# Altium PCB PCB_UROP Project_2_2024-05-20.pcbdoc
Units mil, origin at the board's own origin, x right, y up, seen from the top; angles counter-clockwise.
Board outline 9611.18 x 6875.59 mil, 2 copper layers (Top Layer, Bottom Layer); 32 components, 280 nets, 340 pads, 22 vias.
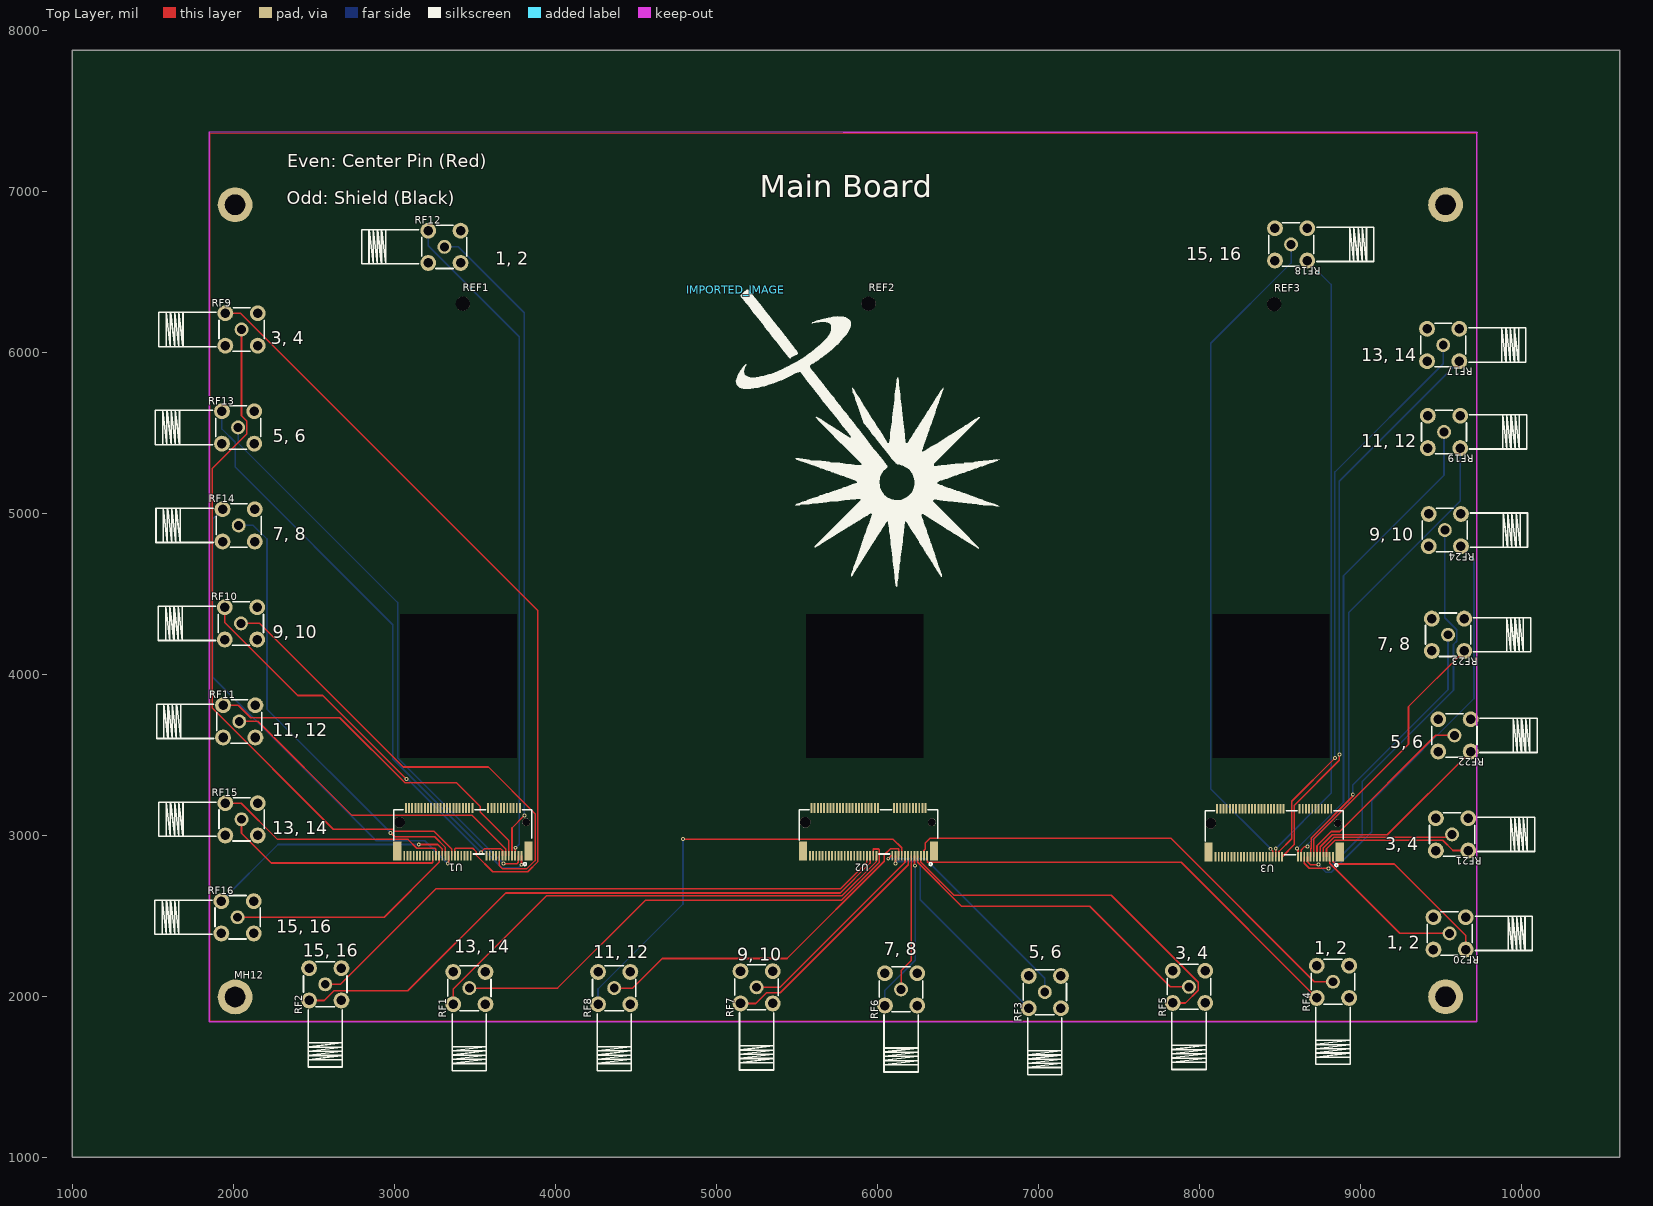
[diagram p0: Top Layer view]
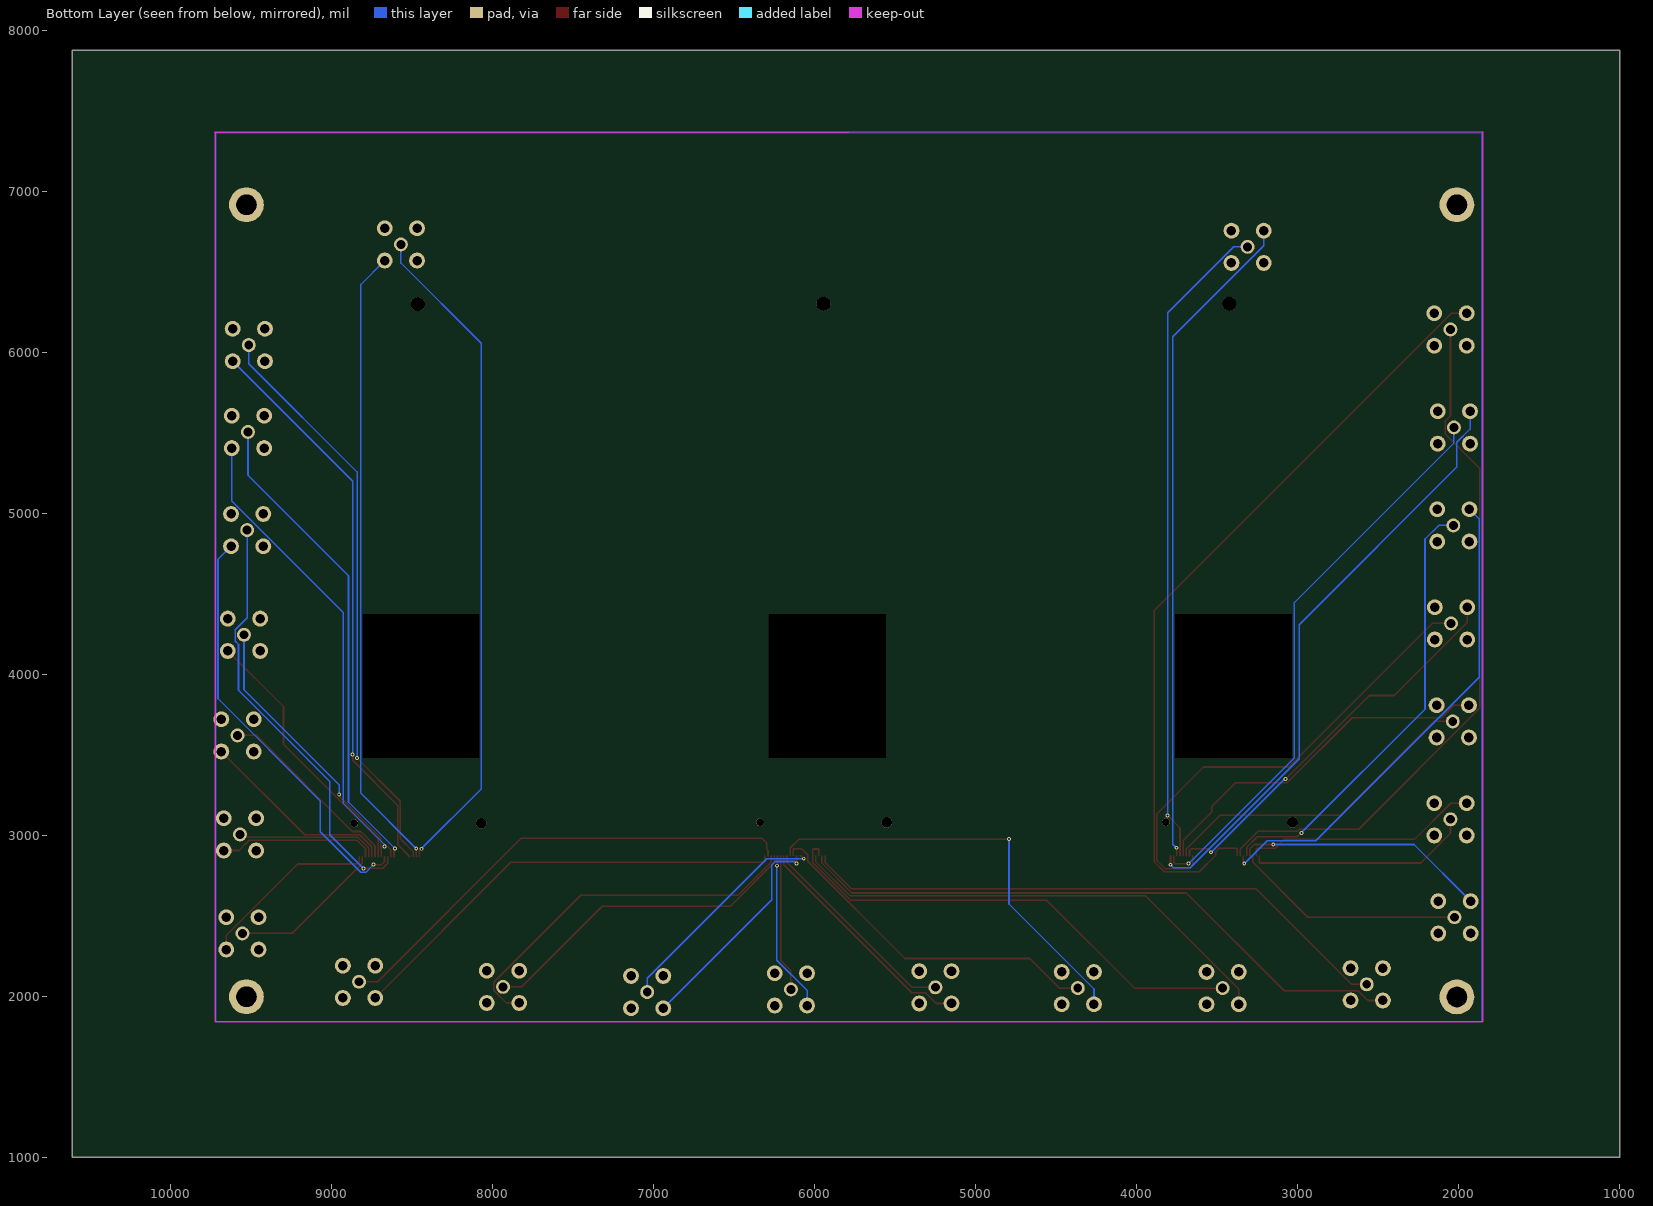
[diagram p1: Bottom Layer view, seen from below]

## Layer stack, top to bottom
Top Layer: signal copper (thickness not stored)
Dielectric: dielectric 12.6, FR-4, Dk 4.8
Bottom Layer: signal copper (thickness not stored)

## Board outline
10611.18,1000 1000,1000 1000,7875.59 10611.18,7875.59
cut-out: 3035.59,4373.09 3035.59,3483.09 3760.59,3483.09 3760.59,4373.09
cut-out: 5559.34,4373.09 5559.34,3483.09 6284.34,3483.09 6284.34,4373.09
cut-out: 8083.09,4373.09 8083.09,3483.09 8808.09,3483.09 8808.09,4373.09

## Components (designator, comment, footprint, x,y, rotation, side; value= is the part's Value field where it differs from the comment)
IMPORTED_IMAGE "IMPORTED_IMAGE" IMPORTED_IMAGE 5121.98,6388.23 r0 top
MH12 "MOUNTINGHOLE_3.2MM_M3_ISO14580_PAD" MOUNTINGHOLE_3.2MM_M3_ISO14580_PAD 2595.6,2040.58 r0 top
REF1 "MOUNTINGHOLE_2.2MM_M2_ISO14580" MOUNTINGHOLE_2.2MM_M2_ISO14580 3425.39,6302.31 r0 top
REF2 "MOUNTINGHOLE_2.2MM_M2_ISO14580" MOUNTINGHOLE_2.2MM_M2_ISO14580 5945.5,6302.31 r0 top
REF3 "MOUNTINGHOLE_2.2MM_M2_ISO14580" MOUNTINGHOLE_2.2MM_M2_ISO14580 8465.58,6298.77 r0 top
RF1 "HJ-SMA003" SMA-TH_HJ-SMA003 3465.59,2050.59 r90 top
RF2 "HJ-SMA003" SMA-TH_HJ-SMA003 2570.59,2074.16 r90 top
RF3 "HJ-SMA003" SMA-TH_HJ-SMA003 7040.59,2025.59 r90 top
RF4 "HJ-SMA003" SMA-TH_HJ-SMA003 8830.59,2089.88 r90 top
RF5 "HJ-SMA003" SMA-TH_HJ-SMA003 7936.3,2058.44 r90 top
RF6 "HJ-SMA003" SMA-TH_HJ-SMA003 6147.74,2042.73 r90 top
RF7 "HJ-SMA003" SMA-TH_HJ-SMA003 5250.59,2055.59 r90 top
RF8 "HJ-SMA003" SMA-TH_HJ-SMA003 4365.59,2050.59 r90 top
RF9 "HJ-SMA003" SMA-TH_HJ-SMA003 2050.59,6142.02 r0 top
RF10 "HJ-SMA003" SMA-TH_HJ-SMA003 2047.02,4316.3 r0 top
RF11 "HJ-SMA003" SMA-TH_HJ-SMA003 2036.3,3707.73 r0 top
RF12 "HJ-SMA003" SMA-TH_HJ-SMA003 3310.59,6655.59 r0 top
RF13 "HJ-SMA003" SMA-TH_HJ-SMA003 2029.16,5533.44 r0 top
RF14 "HJ-SMA003" SMA-TH_HJ-SMA003 2032.73,4924.87 r0 top
RF15 "HJ-SMA003" SMA-TH_HJ-SMA003 2050.59,3099.16 r0 top
RF16 "HJ-SMA003" SMA-TH_HJ-SMA003 2025.59,2490.59 r0 top
RF17 "HJ-SMA003" SMA-TH_HJ-SMA003 9515.59,6045.59 r180 top
RF18 "HJ-SMA003" SMA-TH_HJ-SMA003 8570.59,6670.59 r180 top
RF19 "HJ-SMA003" SMA-TH_HJ-SMA003 9520.59,5505.59 r180 top
RF20 "HJ-SMA003" SMA-TH_HJ-SMA003 9555.59,2390.59 r180 top
RF21 "HJ-SMA003" SMA-TH_HJ-SMA003 9570.59,3005.59 r180 top
RF22 "HJ-SMA003" SMA-TH_HJ-SMA003 9585.59,3620.59 r180 top
RF23 "HJ-SMA003" SMA-TH_HJ-SMA003 9545.59,4245.59 r180 top
RF24 "HJ-SMA003" SMA-TH_HJ-SMA003 9525.59,4895.59 r180 top
U1 "M.2_E-KEY" CONN-SMD_M.2_E-KEY 3425.39,3021.69 r180 top
U2 "M.2_E-KEY" CONN-SMD_M.2_E-KEY 5945.49,3021.69 r180 top
U3 "M.2_E-KEY" CONN-SMD_M.2_E-KEY 8465.59,3015.59 r180 top

## Footprints (in the part's own frame and the unit in brackets; to place one, negate y for a bottom-side part, rotate by r counter-clockwise, add the part's x,y. Pads: shape width x height; smd on the part's side, far side on the other; paste and mask are expansions set on the pad)
CONN-SMD_M.2_E-KEY [mm]
  rect 0.3x1.55 smd paste+0 mask+0.05: 1(-9.25,3.775) 2(-9,-3.775) 3(-8.75,3.775) 4(-8.5,-3.775) 5(-8.25,3.775) 6(-8,-3.775) 7(-7.75,3.775) 8(-7.5,-3.775) 9(-7.25,3.775) 10(-7,-3.775) 11(-6.75,3.775) 12(-6.5,-3.775) 13(-6.25,3.775) 14(-6,-3.775) 15(-5.75,3.775) 16(-5.5,-3.775) 17(-5.25,3.775) 18(-5,-3.775) 19(-4.75,3.775) 20(-4.5,-3.775) 21(-4.25,3.775) 22(-4,-3.775) 23(-3.75,3.775) 32(-1.5,-3.775) 33(-1.25,3.775) 34(-1,-3.775) 35(-0.75,3.775) 36(-0.5,-3.775) 37(-0.25,3.775) 38(0,-3.775) 39(0.25,3.775) 40(0.5,-3.775) 41(0.75,3.775) 42(1,-3.775) 43(1.25,3.775) 44(1.5,-3.775) 45(1.75,3.775) 46(2,-3.775) 47(2.25,3.775) 48(2.5,-3.775) 49(2.75,3.775) 50(3,-3.775) 51(3.25,3.775) 52(3.5,-3.775) 53(3.75,3.775) 54(4,-3.775) 55(4.25,3.775) 56(4.5,-3.775) 57(4.75,3.775) 58(5,-3.775) 59(5.25,3.775) 60(5.5,-3.775) 61(5.75,3.775) 62(6,-3.775) 63(6.25,3.775) 64(6.5,-3.775) 65(6.75,3.775) 66(7,-3.775) 67(7.25,3.775) 68(7.5,-3.775) 69(7.75,3.775) 70(8,-3.775) 71(8.25,3.775) 72(8.5,-3.775) 73(8.75,3.775) 74(9,-3.775) 75(9.25,3.775)
  rect 1.3x3 smd paste+0 mask+0.05: 76(-10.35,3) 77(10.35,3)
  round 1.2 hole 1.2 unplated paste+0: ""(-10,-1.5)
  round 1.7 hole 1.7 unplated paste+0: ""(10,-1.5)
  silkscreen extent -10.9,-3.5 10.9,5.32
IMPORTED_IMAGE [mil]
  silkscreen extent 0,-1845 1637,0
MOUNTINGHOLE_2.2MM_M2_ISO14580 [mm]
  round 2.2 hole 2.2 slot 2.205 at 0 deg unplated paste+0 mask+0.102: 1(0,0)
MOUNTINGHOLE_3.2MM_M3_ISO14580_PAD [mil]
  round 216.53 hole 125.98 slot 126.18 at 0 deg paste+0 mask+2: 1(-585.01,-44.99)
SMA-TH_HJ-SMA003 [mm]
  round 2.2 hole 1.4 paste+0 mask+0.051: 1(0,0)
  round 2.5 hole 1.5 paste+0 mask+0.051: 2(-2.55,2.55) 3(-2.55,-2.55) 4(2.55,-2.55) 5(2.55,2.55)
  silkscreen extent -13.04,-3.43 3.56,3.43

## Free pads (board coordinates)
  round 216.53 hole 125.98 slot 126.18 at 0 deg paste+0 mask+2: 1(2010.59,6916.84) 1(9530.26,1996.89) 1(9530.26,6916.84)

## Via types
v1: diameter 24.02, hole 12.01, Top Layer to Bottom Layer, tented both sides, 22 vias

## Nets (pads, with @x,y where several pads share a name; then routed paths per layer and width w, separated by ;. In a path a pad name is that pad's centre, name@x,y a point inside that pad or via, vN(x,y) a via of type N, cw(c..) or ccw(c..) an arc to the next point about the centre after c; other vN are vias at no path point)
GND: 
RF1_3: RF1.3
RF1_4: RF1.4
RF1_5: RF1.5
RF2_3: RF2.3
RF2_4: RF2.4
RF2_5: RF2.5
RF3_3: RF3.3
RF3_4: RF3.4
RF3_5: RF3.5
RF4_3: RF4.3
RF4_4: RF4.4
RF4_5: RF4.5
RF5_3: RF5.3
RF5_4: RF5.4
RF5_5: RF5.5
RF6_3: RF6.3
RF6_4: RF6.4
RF6_5: RF6.5
RF7_3: RF7.3
RF7_4: RF7.4
RF7_5: RF7.5
RF8_3: RF8.3
RF8_4: RF8.4
RF8_5: RF8.5
RF9_1: RF9.1 U1.45 | length 4347.2
  Top Layer w10: RF9.1 2050.59,5606.53 2083.53,5573.59 2083.53,5493.33 1868.2,5278 1868.2,3790.06 2619.99,3038.27 2986.45,3038.27 3000.8,3023.92 3247.14,3023.92 3356.49,2914.57 U1.45
RF9_2: RF9.2 U1.43 | length 4924.2
  Top Layer w10: RF9.2 2044.7,6242.41 3891.58,4395.53 3891.58,2836.39 3828.34,2773.15 3611.52,2773.15 3507.63,2877.04 3507.63,2898.62 3486.47,2919.78 3381.39,2919.78 3376.18,2914.57 U1.43
RF9_3: RF9.3
RF9_4: RF9.4
RF9_5: RF9.5
RF10_1: RF10.1 U1.15 | length 2920.9
  Top Layer w10: RF10.1 2162.57,4316.3 3054.84,3424.03 3584.35,3424.03 3873.97,3134.41 3873.97,2843.46 3821.39,2790.88 3673.42,2790.88 3651.77,2812.53 U1.15
RF10_2: RF10.2 U1.13 | length 2457.4
  Top Layer w10: RF10.2 1946.63,4322.21 2400.45,3868.39 2555.19,3868.39 v1(3074.98,3348.6) ; v1(3537.13,2894.45) 3559.91,2917.23 3659.66,2917.23 3671.45,2905.44 U1.13
  Bottom Layer w10: v1(3074.98,3348.6) 3082.98,3348.6 v1(3537.13,2894.45)
RF10_3: RF10.3
RF10_4: RF10.4
RF10_5: RF10.5
RF11_1: RF11.1 U1.11 | length 2024.9
  Top Layer w10: RF11.1 2151.85,3707.73 2734.3,3125.28 3480.43,3125.28 3691.14,2914.57 U1.11
RF11_2: RF11.2 U1.9 | length 2237.3
  Top Layer w10: RF11.2 2030.41,3808.12 2108.37,3730.16 2660.81,3730.16 3065.43,3325.54 3386.44,3325.54 3533.66,3178.32 3533.66,3144.76 3710.82,2967.6 U1.9
RF11_3: RF11.3
RF11_4: RF11.4
RF11_5: RF11.5
RF12_1: RF12.1 U1.7 | length 4071
  Top Layer w10: U1.7 3730.51,3045.51 v1(3807.47,3122.47)
  Bottom Layer w10: RF12.1 3397.25,6655.59 3807.47,6245.37 v1(3807.47,3122.47)
RF12_2: RF12.2 U1.5 | length 4127.2
  Top Layer w10: U1.5 3750.19,2919.26 v1(3753.58,2922.65)
  Bottom Layer w10: RF12.2 3210.2,6661.5 3775.11,6096.59 3775.11,2944.18 v1(3753.58,2922.65)
RF12_3: RF12.3
RF12_4: RF12.4
RF12_5: RF12.5
RF13_1: RF13.1 U1.3 | length 3529.4
  Top Layer w10: v1(3678.29,2823.56) 3761.87,2823.56 3769.88,2831.57 U1.3
  Bottom Layer w10: RF13.1 2029.16,5436.75 3020.05,4445.86 3020.05,3481.8 v1(3678.29,2823.56)
RF13_2: RF13.2 U1.1 | length 3741.2
  Top Layer w10: v1(3789.56,2817.05) U1.1
  Bottom Layer w10: RF13.2 1928.77,5524.13 2011.47,5441.43 2011.47,5287.44 2990.4,4308.51 2990.4,3475.1 3666.49,2799.01 3771.52,2799.01 v1(3789.56,2817.05)
RF13_3: RF13.3
RF13_4: RF13.4
RF13_5: RF13.5
RF14_1: RF14.1 U1.49 | length 2783.5
  Top Layer w10: v1(2976.89,3015.21) 3001.88,2990.22 3251.32,2990.22 3317.12,2924.42 U1.49
  Bottom Layer w10: RF14.1 2124.19,4924.87 2208.44,4840.62 2208.44,3783.66 v1(2976.89,3015.21)
RF14_2: RF14.2 U1.47 | length 3060.5
  Top Layer w10: v1(3331.77,2823.59) 3336.81,2828.63 U1.47
  Bottom Layer w10: RF14.2 1871.36,4964.28 1871.36,3981.7 2886.96,2966.1 3189.26,2966.1 v1(3331.77,2823.59)
RF14_3: RF14.3
RF14_4: RF14.4
RF14_5: RF14.5
RF15_1: RF15.1 U1.57 | length 1394.1
  Top Layer w10: RF15.1 2050.59,3012.5 2235.44,2827.65 3234.46,2827.65 3238.38,2831.57 U1.57
RF15_2: RF15.2 U1.55 | length 1467.4
  Top Layer w10: RF15.2@1950.2,3199.55 2047.92,3199.55 2273.31,2974.16 3085.06,2974.16 3139.38,2919.84 3252.8,2919.84 3258.07,2914.57 U1.55
RF15_3: RF15.3
RF15_4: RF15.4
RF15_5: RF15.5
RF16_1: RF16.1 U1.53 | length 1434.9
  Top Layer w10: RF16.1 2936.77,2490.59 3277.75,2831.57 U1.53
RF16_2: RF16.2 U1.51 | length 1571.2
  Top Layer w10: v1(3151.51,2942.9) 3269.11,2942.9 3297.44,2914.57 U1.51
  Bottom Layer w10: RF16.2 2277.12,2942.9 v1(3151.51,2942.9)
RF16_3: RF16.3
RF16_4: RF16.4
RF16_5: RF16.5
RF17_3: RF17.3
RF17_4: RF17.4
RF17_5: RF17.5
RF18_3: RF18.3
RF18_4: RF18.4
RF18_5: RF18.5
RF19_3: RF19.3
RF19_4: RF19.4
RF19_5: RF19.5
RF20_3: RF20.3
RF20_4: RF20.4
RF20_5: RF20.5
RF21_3: RF21.3
RF21_4: RF21.4
RF21_5: RF21.5
RF22_3: RF22.3
RF22_4: RF22.4
RF22_5: RF22.5
RF23_3: RF23.3
RF23_4: RF23.4
RF23_5: RF23.5
RF24_3: RF24.3
RF24_4: RF24.4
RF24_5: RF24.5
U1_2: U1.2
U1_4: U1.4
U1_6: U1.6
U1_8: U1.8
U1_10: U1.10
U1_12: U1.12
U1_14: U1.14
U1_16: U1.16
U1_17: U1.17
U1_18: U1.18
U1_19: U1.19
U1_20: U1.20
U1_21: U1.21
U1_22: U1.22
U1_23: U1.23
U1_32: U1.32
U1_33: U1.33
U1_34: U1.34
U1_35: U1.35
U1_36: U1.36
U1_37: U1.37
U1_38: U1.38
U1_39: U1.39
U1_40: U1.40
U1_41: U1.41
U1_42: U1.42
U1_44: U1.44
U1_46: U1.46
U1_48: U1.48
U1_50: U1.50
U1_52: U1.52
U1_54: U1.54
U1_56: U1.56
U1_58: U1.58
U1_59: U1.59
U1_60: U1.60
U1_61: U1.61
U1_62: U1.62
U1_63: U1.63
U1_64: U1.64
U1_65: U1.65
U1_66: U1.66
U1_67: U1.67
U1_68: U1.68
U1_69: U1.69
U1_70: U1.70
U1_71: U1.71
U1_72: U1.72
U1_73: U1.73
U1_74: U1.74
U1_75: U1.75
U1_76: U1.76
U1_77: U1.77
U2_1: RF4.2 U2.1 | length 2810.8
  Top Layer w10: U2.1 6309.66,2831.57 7888.12,2831.57 RF4.2
U2_2: U2.2
U2_3: RF4.1 U2.3 | length 2995.3
  Top Layer w10: U2.3 6289.98,2906.19 6298.63,2914.84 6298.63,2951.8 6327.56,2980.73 7824.2,2980.73 8715.05,2089.88 RF4.1
U2_4: U2.4
U2_5: RF5.2 U2.5 | length 2311.3
  Top Layer w10: U2.5 6270.29,2834.6 6477.17,2627.72 7452.72,2627.72 7993.52,2086.92 7993.52,2037.6 7913.97,1958.05 RF5.2
U2_6: U2.6
U2_7: RF5.1 U2.7 | length 2047.4
  Top Layer w10: U2.7 6250.61,2831.57 6522.8,2559.38 7319.83,2559.38 7820.77,2058.44 RF5.1
U2_8: U2.8
U2_9: RF6.2 U2.9 | length 1010.1
  Top Layer w10: U2.9 6230.92,2814.9 v1(6234.96,2810.86)
  Bottom Layer w10: RF6.2 6047.34,2036.83 6234.96,2224.45 v1(6234.96,2810.86)
U2_10: U2.10
U2_11: RF6.1 U2.11 | length 856.6
  Top Layer w10: RF6.1 6147.73,2158.27 6211.24,2221.78 U2.11
U2_12: U2.12
U2_13: RF7.2 U2.13 | length 1454.6
  Top Layer w10: RF7.2 5244.69,1955.2 5311.33,2021.84 5396.7,2021.84 6191.55,2816.69 U2.13
U2_14: U2.14
U2_15: RF7.1 U2.15 | length 1284.2
  Top Layer w10: RF7.1 5395.89,2055.59 6171.87,2831.57 U2.15
U2_16: U2.16
U2_17: RF8.2 U2.17 | length 2674.9
  Top Layer w10: v1(4793.18,2976.11) 6097.92,2976.11 6152.18,2921.85 U2.17
  Bottom Layer w10: RF8.2 4265.2,2044.69 4793.18,2572.67 v1(4793.18,2976.11)
U2_18: U2.18
U2_19: RF8.1 U2.19 | length 2191.2
  Top Layer w10: RF8.1 4481.14,2050.59 4664.73,2234.18 5439.2,2234.18 6044.02,2839 6044.02,2878.75 6081.78,2916.51 6130.56,2916.51 6132.5,2914.57 U2.19
U2_20: U2.20
U2_21: RF3.2 U2.21 | length 1386.4
  Top Layer w10: v1(6112.81,2824.16) U2.21
  Bottom Layer w10: v1(6112.81,2824.16) 6125.77,2837.12 6245.14,2837.12 6266.32,2815.94 6266.32,2599.08 RF3.2
U2_22: U2.22
U2_23: RF3.1 U2.23 | length 1399.3
  Top Layer w10: v1(6068.11,2854.41) 6086.77,2873.07 U2.23
  Bottom Layer w10: v1(6068.11,2854.41) 6298.43,2854.41 7040.59,2112.25 RF3.1
U2_32: U2.32
U2_33: RF1.2 U2.33 | length 3088.1
  Top Layer w10: RF1.2 3365.2,2044.69 3945.97,2625.46 5782.92,2625.46 5994.7,2837.24 U2.33
U2_34: U2.34
U2_35: RF1.1 U2.35 | length 3029.2
  Top Layer w10: RF1.1 4013.04,2050.59 4559.45,2597 5777.17,2597 6011.67,2831.5 6011.67,2911.73 6008.76,2914.64 5975.09,2914.64 5975.02,2914.57 U2.35
U2_36: U2.36
U2_37: RF2.2 U2.37 | length 3884.4
  Top Layer w10: RF2.2 2564.69,1973.77 2624.96,2034.04 3083.79,2034.04 3691.27,2641.52 5769.47,2641.52 5955.33,2827.38 U2.37
U2_38: U2.38
U2_39: RF2.1 U2.39 | length 3720.3
  Top Layer w10: RF2.1 2665.16,2074.16 3258.88,2667.88 5771.96,2667.88 5935.65,2831.57 U2.39
U2_40: U2.40
U2_41: U2.41
U2_42: U2.42
U2_43: U2.43
U2_44: U2.44
U2_45: U2.45
U2_46: U2.46
U2_47: U2.47
U2_48: U2.48
U2_49: U2.49
U2_50: U2.50
U2_51: U2.51
U2_52: U2.52
U2_53: U2.53
U2_54: U2.54
U2_55: U2.55
U2_56: U2.56
U2_57: U2.57
U2_58: U2.58
U2_59: U2.59
U2_60: U2.60
U2_61: U2.61
U2_62: U2.62
U2_63: U2.63
U2_64: U2.64
U2_65: U2.65
U2_66: U2.66
U2_67: U2.67
U2_68: U2.68
U2_69: U2.69
U2_70: U2.70
U2_71: U2.71
U2_72: U2.72
U2_73: U2.73
U2_74: U2.74
U2_75: U2.75
U2_76: U2.76
U2_77: U2.77
U3_1: RF20.2 U3.1 | length 1133
  Top Layer w10: U3.1 8829.76,2838.12 8846.04,2821.84 9211.39,2821.84 9655.98,2377.25 RF20.2
U3_2: U3.2
U3_3: RF20.1 U3.3 | length 967.1
  Top Layer w10: U3.3 8810.08,2825.47 9244.96,2390.59 RF20.1
U3_4: U3.4
U3_5: RF21.2 U3.5 | length 978.6
  Top Layer w10: U3.5 8790.39,2916.77 8842.81,2969.19 9512.5,2969.19 9576.49,2905.2 RF21.2
U3_6: U3.6
U3_7: RF21.1 U3.7 | length 889
  Top Layer w10: U3.7 8770.71,2921.16 8836.22,2986.67 9551.67,2986.67 RF21.1
U3_8: U3.8
U3_9: RF22.2 U3.9 | length 1241.3
  Top Layer w10: U3.9 8751.02,2928.07 8825.68,3002.73 9168.51,3002.73 RF22.2
U3_10: U3.10
U3_11: RF22.1 U3.11 | length 1206.1
  Top Layer w10: U3.11 8731.34,2934.65 8820.41,3023.72 8873.18,3023.72 9470.05,3620.59 RF22.1
U3_12: U3.12
U3_13: RF23.2 U3.13 | length 1665.2
  Top Layer w10: U3.13 8711.65,2908.47 8711.78,2908.6 8711.78,2976.69 9300.21,3565.12 9300.21,3799.43 RF23.2
U3_14: U3.14
U3_15: RF23.1 U3.15 | length 1732.2
  Top Layer w10: U3.15 8691.97,2916.29 8695.73,2920.05 8695.73,2983.35 8954.03,3241.65 v1(8954.03,3252.63)
  Bottom Layer w10: v1(8954.03,3252.63) 8954.03,3311.9 9545.59,3903.46 RF23.1
U3_16: U3.16
U3_17: RF24.2 U3.17 | length 2631.6
  Top Layer w10: U3.17 8672.28,2834.61 8689.02,2817.87 v1(8741.18,2817.87)
  Bottom Layer w10: v1(8741.18,2817.87) 8788.09,2770.96 8819.72,2770.96 9071.25,3022.49 9071.25,3213.11 9707.12,3848.98 9707.12,4714.06 RF24.2
U3_18: U3.18
U3_19: RF24.1 U3.19 | length 2667.5
  Top Layer w10: U3.19 8652.6,2825.47 8683.79,2794.28 v1(8803.82,2794.28)
  Bottom Layer w10: v1(8803.82,2794.28) 9013.14,3003.6 9013.14,3334.15 9579.57,3900.58 9579.57,4185.08 9599.96,4205.47 9599.96,4276.46 9525.59,4350.83 RF24.1
U3_20: U3.20
U3_21: RF19.2 U3.21 | length 2958.4
  Top Layer w10: U3.21 8632.91,2908.47 8654.05,2929.61 v1(8672.67,2929.61)
  Bottom Layer w10: v1(8672.67,2929.61) 8672.67,2943.17 8929.7,3200.2 8929.7,4384.93 9620.98,5076.21 RF19.2
U3_22: U3.22
U3_23: RF19.1 U3.23 | length 3019.8
  Top Layer w10: v1(8606.77,2917.21) 8606.77,2914.93 8613.23,2908.47 U3.23
  Bottom Layer w10: v1(8606.77,2917.21) 8896.24,3206.68 8896.24,4613.01 9520.59,5237.36 RF19.1
U3_32: U3.32
U3_33: RF17.2 U3.33 | length 3534.4
  Top Layer w10: U3.33 8591.22,2943.39 8591.22,3186.21 8870.53,3465.52 v1(8870.54,3501.54)
  Bottom Layer w10: v1(8870.54,3501.54) 8870.54,5199.76 RF17.2
U3_34: U3.34
U3_35: RF17.1 U3.35 | length 3601.3
  Top Layer w10: U3.35 8495.12,2899.65 8573.86,2978.39 8573.86,3211.13 v1(8842.88,3480.15)
  Bottom Layer w10: v1(8842.88,3480.15) 8842.88,5257.33 9515.59,5930.04 RF17.1
U3_36: U3.36
U3_37: RF18.2 U3.37 | length 3907
  Top Layer w10: U3.37 v1(8475.43,2916.85)
  Bottom Layer w10: v1(8475.43,2916.85) 8819.14,3260.56 8819.14,6422.04 RF18.2
U3_38: U3.38
U3_39: RF18.1 U3.39 | length 4169.1
  Top Layer w10: v1(8443.48,2915.89) 8455.75,2903.62 U3.39
  Bottom Layer w10: v1(8443.48,2915.89) 8072.03,3287.34 8072.03,6056.48 8570.59,6555.04 RF18.1
U3_40: U3.40
U3_41: U3.41
U3_42: U3.42
U3_43: U3.43
U3_44: U3.44
U3_45: U3.45
U3_46: U3.46
U3_47: U3.47
U3_48: U3.48
U3_49: U3.49
U3_50: U3.50
U3_51: U3.51
U3_52: U3.52
U3_53: U3.53
U3_54: U3.54
U3_55: U3.55
U3_56: U3.56
U3_57: U3.57
U3_58: U3.58
U3_59: U3.59
U3_60: U3.60
U3_61: U3.61
U3_62: U3.62
U3_63: U3.63
U3_64: U3.64
U3_65: U3.65
U3_66: U3.66
U3_67: U3.67
U3_68: U3.68
U3_69: U3.69
U3_70: U3.70
U3_71: U3.71
U3_72: U3.72
U3_73: U3.73
U3_74: U3.74
U3_75: U3.75
U3_76: U3.76
U3_77: U3.77
pads on no net: MH12.1 REF1.1 REF2.1 REF3.1 U1. U2. U3.

## Polygon pours and split planes (outlines as drawn)
GND on Bottom Layer (solid): 1855.59,1845.59 1855.59,7360.59 9720.59,7360.59 9720.59,1845.59 1855.59,1845.59
GND on Top Layer (solid): 1855.59,1845.59 1855.59,7360.59 8545.59,7360.59 9720.59,7360.59 9720.59,1845.59

## Silkscreen, mask and mechanical layers (free items; w line width, h text height)
Top Overlay:
  text "Even: Center Pin (Red)" at 2335.59,7150.59 h80
  text "Odd: Shield (Black)" at 2330.59,6920.59 h80
  text "Main Board" at 5270.59,6915.59 h237.48
  text "15, 16" at 7920.59,6570.59 h80
  text "1, 2" at 3625.59,6545.59 h80
  text "3, 4" at 2230.59,6051.3 h80
  text "13, 14" at 9005.59,5945.59 h80
  text "5, 6" at 2245.59,5442.02 h80
  text "11, 12" at 9005.59,5410.59 h80
  text "7, 8" at 2245.59,4832.73 h80
  text "9, 10" at 9055.59,4830.59 h80
  text "9, 10" at 2245.59,4223.45 h80
  text "7, 8" at 9105.59,4150.59 h80
  text "11, 12" at 2240.59,3614.16 h80
  text "5, 6" at 9185.59,3540.59 h80
  text "13, 14" at 2240.59,3004.88 h80
  text "3, 4" at 9155.59,2905.59 h80
  text "15, 16" at 2265.59,2395.59 h80
  text "1, 2" at 9165.59,2295.59 h80
  text "13, 14" at 3372.17,2270.59 h80
  text "1, 2" at 8715.59,2260.59 h80
  text "7, 8" at 6040.59,2255.59 h80
  text "15, 16" at 2430.59,2245.59 h80
  text "11, 12" at 4235.59,2235.59 h80
  text "5, 6" at 6940.59,2235.59 h80
  text "3, 4" at 7851.1,2230.59 h80
  text "9, 10" at 5130.59,2220.59 h80